# EAGLE board ETAG_v3 (EAGLE 7.5.0)
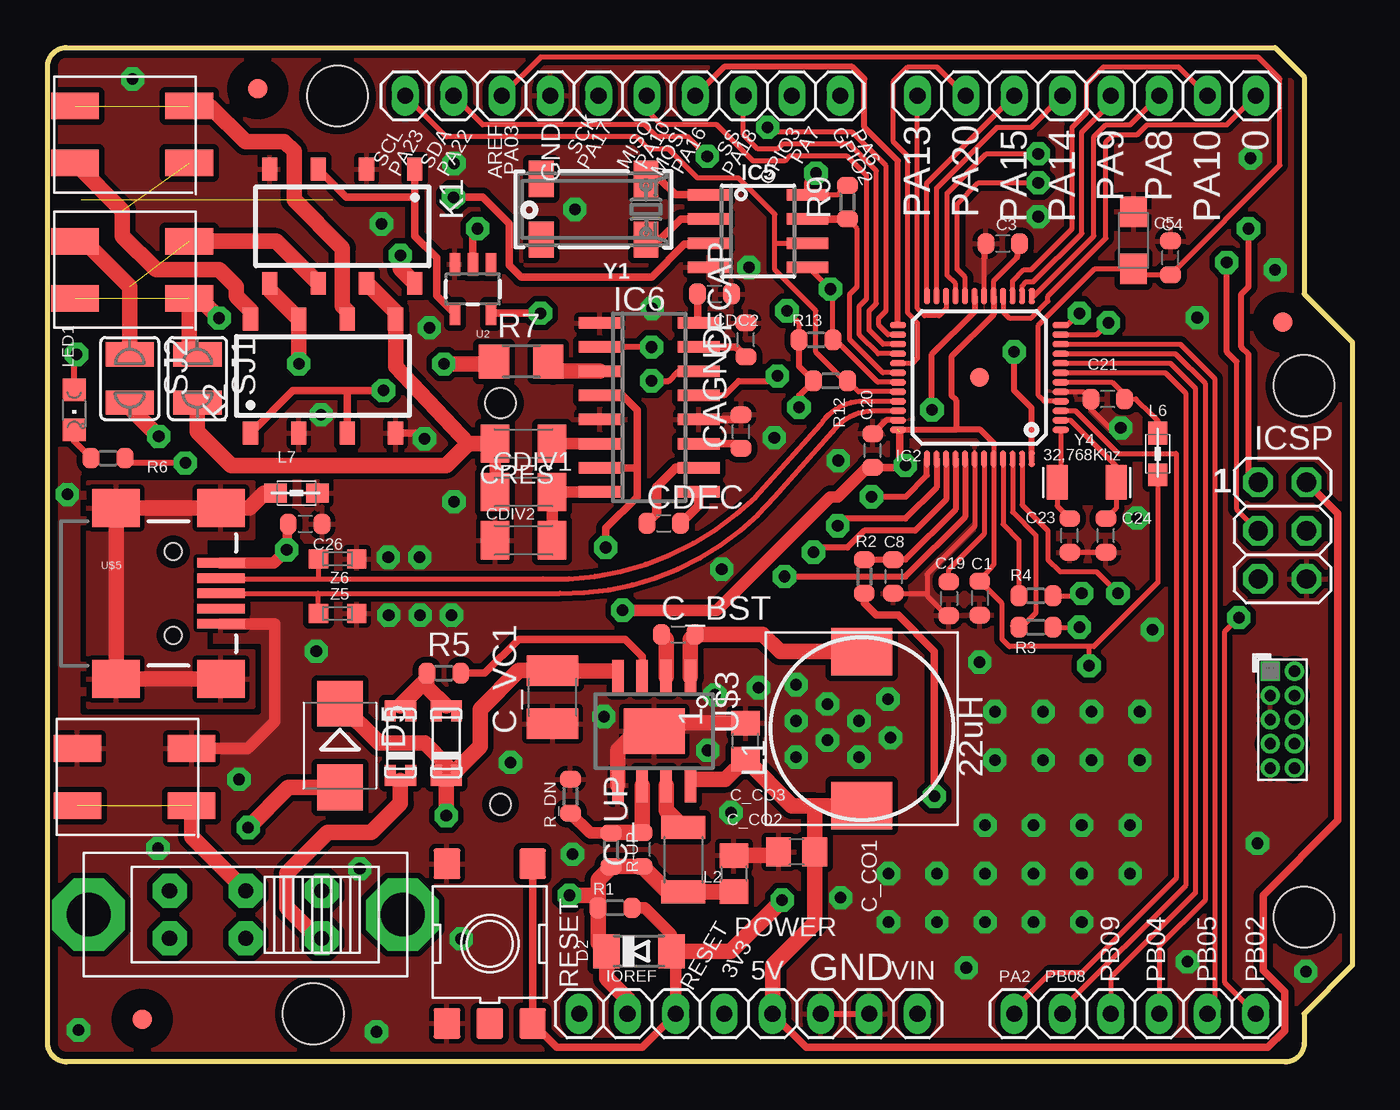
[diagram p0: board, top side]
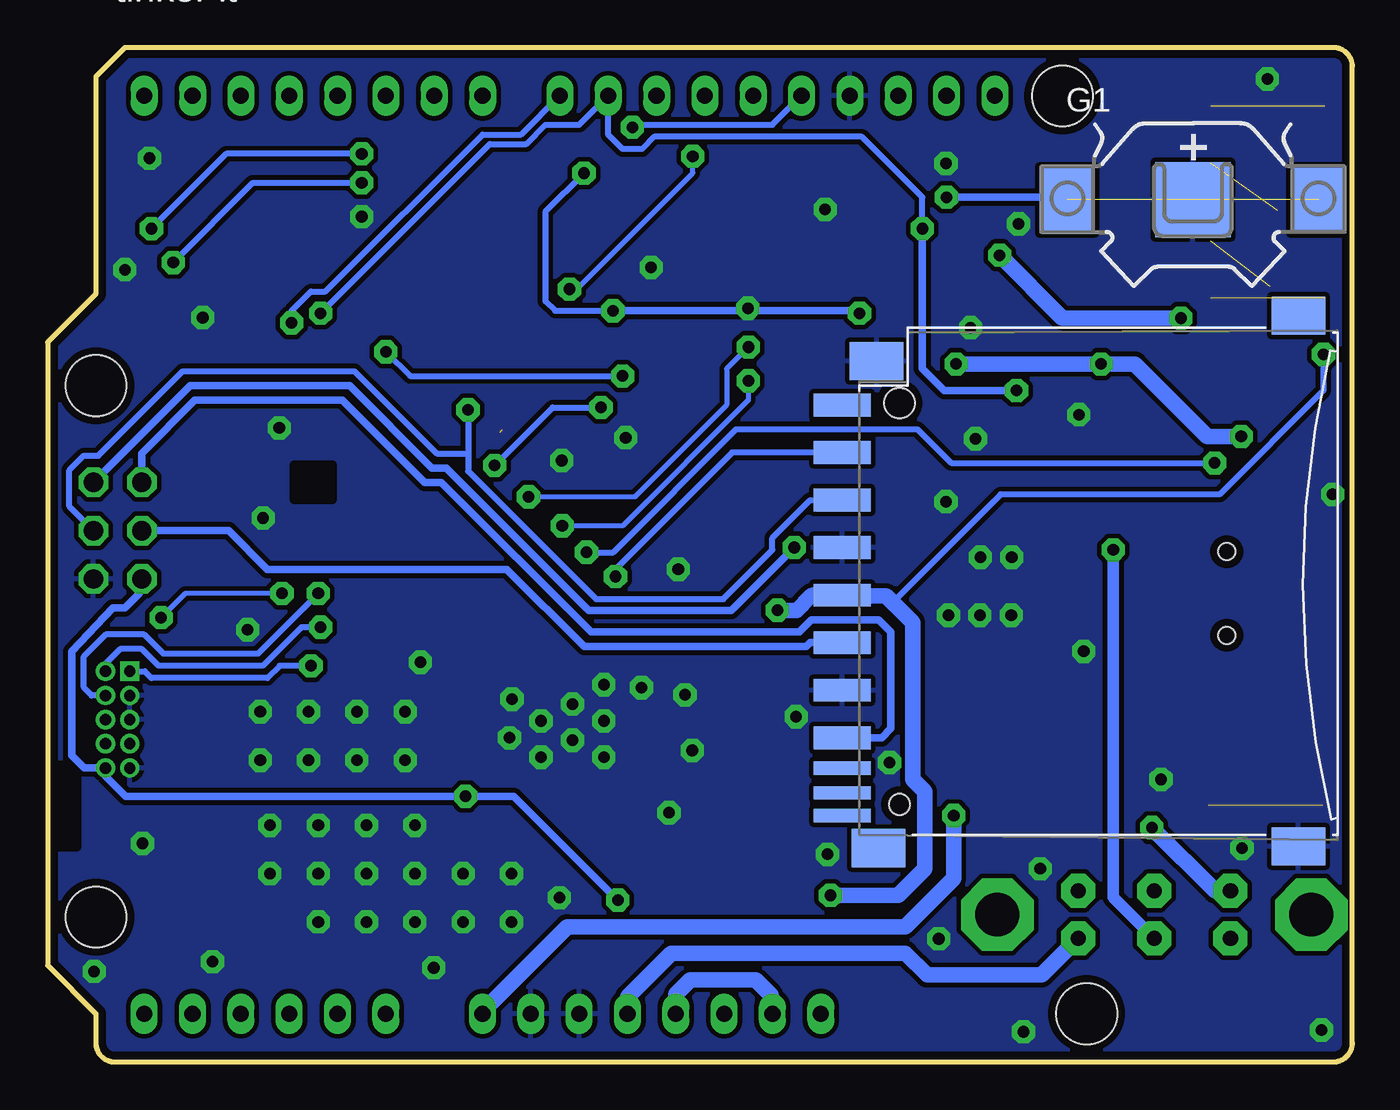
[diagram p1: board, bottom side, seen from below]

Size 68.58 x 53.34 mm. Coordinates in mm from the lower left corner, seen from the top.
Outline: 64.52,53.34 66.04,51.82 66.04,40.39 68.58,37.85 68.58,5.08 66.04,2.54 66.04,1 arc-90 65.04,0 1,0 arc-90 0,1 0,52.34 arc-90 1,53.34 64.52,53.34
Copper layers (1*2+15*16): Top 0.035mm / dielectric 0.5mm / Route2 0.035mm / dielectric 0.4mm / Ground 0.035mm / dielectric 0.5mm / Bottom 0.035mm
Design rules "ArduinoUno *": minimum track width 6mil, minimum drill 16mil, track to track 8mil, track to pad 8mil, pad to pad 4mil, via to via 8mil, smd to smd 4mil, copper to edge 16mil, drill to drill 10mil, minimum pad ring 6mil, minimum via ring 4.5mil, stop-mask expansion 1mil, vias tented up to drill 32mil, thermal gap 10mil
Net classes: 1 USB: width 0.203 mm, drill 0.305 mm, clearance 0.178 mm; 2 gnd: width 0.254 mm, drill 0.254 mm, clearance 0.178 mm; 3 usbvcc: width 0.203 mm, drill 0.406 mm, clearance 0.178 mm; 4 USBpair: width 0.254 mm, drill 0.406 mm, clearance 0.406 mm
Holes 3.2 mm at 66.04,35.56 66.04,7.62 15.24,50.8 13.97,2.54
bRestrict: area 67.1,11.3 to 68.8,15.6
vRestrict: area 42.2,47.2 to 43.3,48.8; area 48.3,47.5 to 49.5,48.9; area 47.6,47.4 to 48.8,48.9; area 50.2,47.4 to 51.3,48.9; area 44.7,47.2 to 45.8,48.8

## Footprints (pad centres in the part's own frame; a part is rotated, then mirrored left to right if it is on the bottom)
1X06 = drill 0.85 pad 1.422 long: 1 -6.35,0; 2 -3.81,0; 3 -1.27,0; 4 1.27,0; 5 3.81,0; 6 6.35,0
LITE_TRAP_MINI = smd 2.5 x 1.4: P$1 -3,1.5; P$2 3,1.5; P$3 -3,-1.5; P$4 3,-1.5
C0603-ROUND = smd 0.898 x 1.1: 1 -0.889,0; 2 0.889,0
SMC_A = smd 1.6 x 1.4: + -1.5,0; - 1.5,0
C0805 = smd 1.3 x 1.5: 1 -0.95,0; 2 0.95,0
C1210 = smd 1.6 x 2.7: 1 -1.4,0; 2 1.4,0
C1206K = smd 1.5 x 2: 1 -1.5,0; 2 1.5,0
PINHEAD_2X05_127 = drill 0.6 pad 1.016 square: 1 -0.635,2.54 | drill 0.6 pad 1.016: 2 0.635,2.54; 3 -0.635,1.27; 4 0.635,1.27; 5 -0.635,0; 6 0.635,0; 7 -0.635,-1.27; 8 0.635,-1.27; 9 -0.635,-2.54; 10 0.635,-2.54
MINIMELF = smd 1.4 x 1.8: A 1.7,0; C -1.7,0
LL-34 = smd 0.6 x 1.65: P$1 -1.95,0; P$2 1.95,0 | smd 0.5 x 0.575: P$3 -1.4,0.537; P$4 -1.4,-0.537; P$5 1.4,0.537; P$6 1.4,-0.537
SMB = smd 2.4 x 2.4: A 2.2,0; C -2.2,0
FIDUCIA-MOUNT = smd 1.016 x 1.016: P$1 0,0
10MM_SM_COIN_CELL_CLIP = smd 2.9 x 3.5: +@1 -6.6,0; +@2 6.6,0 | smd 3.96 x 3.96: - 0,0
TQFP48-7X7 = smd 0.85 x 0.32: 1 -4.275,2.75; 2 -4.275,2.25; 3 -4.275,1.75; 4 -4.275,1.25; 5 -4.275,0.75; 6 -4.275,0.25; 7 -4.275,-0.25; 8 -4.275,-0.75; 9 -4.275,-1.25; 10 -4.275,-1.75; 11 -4.275,-2.25; 12 -4.275,-2.75; 25 4.275,-2.75; 26 4.275,-2.25; 27 4.275,-1.75; 28 4.275,-1.25; 29 4.275,-0.75; 30 4.275,-0.25; 31 4.275,0.25; 32 4.275,0.75; 33 4.275,1.25; 34 4.275,1.75; 35 4.275,2.25; 36 4.275,2.75 | smd 0.32 x 0.85: 13 -2.75,-4.275; 14 -2.25,-4.275; 15 -1.75,-4.275; 16 -1.25,-4.275; 17 -0.75,-4.275; 18 -0.25,-4.275; 19 0.25,-4.275; 20 0.75,-4.275; 21 1.25,-4.275; 22 1.75,-4.275; 23 2.25,-4.275; 24 2.75,-4.275; 37 2.75,4.275; 38 2.25,4.275; 39 1.75,4.275; 40 1.25,4.275; 41 0.75,4.275; 42 0.25,4.275; 43 -0.25,4.275; 44 -0.75,4.275; 45 -1.25,4.275; 46 -1.75,4.275; 47 -2.25,4.275; 48 -2.75,4.275 | smd 1 x 1: P$1 0,0
SOIC8_150MIL = smd 0.6 x 2.2: 1 -1.905,-2.6; 2 -0.635,-2.6; 3 0.635,-2.6; 4 1.905,-2.6; 5 1.905,2.6; 6 0.635,2.6; 7 -0.635,2.6; 8 -1.905,2.6
SO16 = smd 0.6 x 2.2: 1 -4.445,-2.6; 2 -3.175,-2.6; 3 -1.905,-2.6; 4 -0.635,-2.6; 5 0.635,-2.6; 6 1.905,-2.6; 7 3.175,-2.6; 8 4.445,-2.6; 9 4.445,2.6; 10 3.175,2.6; 11 1.905,2.6; 12 0.635,2.6; 13 -0.635,2.6; 14 -1.905,2.6; 15 -3.175,2.6; 16 -4.445,2.6
2X03 = drill 1.016 pad 1.55 octagon: 1 -2.54,-1.27; 2 -2.54,1.27; 3 0,-1.27; 4 0,1.27; 5 2.54,-1.27; 6 2.54,1.27
1X10 = drill 0.85 pad 1.422 long: 1 -11.43,0; 2 -8.89,0; 3 -6.35,0; 4 -3.81,0; 5 -1.27,0; 6 1.27,0; 7 3.81,0; 8 6.35,0; 9 8.89,0; 10 11.43,0
1X08 = drill 0.85 pad 1.422 long: 1 -8.89,0; 2 -6.35,0; 3 -3.81,0; 4 -1.27,0; 5 1.27,0; 6 3.81,0; 7 6.35,0; 8 8.89,0
SOP08 = smd 0.8 x 1.2: 1 -3.81,-3; 2 -1.27,-3; 3 1.27,-3; 4 3.81,-3; 5 3.81,3; 6 1.27,3; 7 -1.27,3; 8 -3.81,3
SLF10165 = smd 2.5 x 3.2: P$1 -4.05,0; P$2 4.05,0
L1008(2520METRIC) = smd 1.2 x 2.3: 1 -1.7,0; 2 1.7,0
0805 = smd 1.2 x 1: 1 -1.1,0; 2 1.1,0
CHIPLED_0805 = smd 1.2 x 1.2: A 0,-1.05; C 0,1.05
R0603-ROUND = smd 0.898 x 1.1: 1 -0.889,0; 2 0.889,0
R1206 = smd 1.6 x 1.803: 1 -1.422,0; 2 1.422,0
TS42 = smd 1.6 x 1.4: 1 -4.2,2.25; 2 4.2,2.25; 3 -4.2,-2.25; 4 4.2,-2.25; 5 -4.2,0
SJW = smd 1.27 x 2.54: 1 -1.27,0; 2 1.27,0
TP-SP = smd 0.8 x 0.8 bottom: X 0,0
SOT23-5 = smd 0.55 x 1.2: 1 -0.95,-1.3; 2 0,-1.3; 3 0.95,-1.3; 4 0.95,1.3; 5 -0.95,1.3
SOP08_GNDPAD = smd 0.6 x 1.8: 1 -1.905,-2.85; 2 -0.635,-2.85; 3 0.635,-2.85; 4 1.905,-2.85; 5 1.905,2.85; 6 0.635,2.85; 7 -0.635,2.85; 8 -1.905,2.85 | smd 3.2 x 2.4: P$1 0,0
06132 = smd 1.2 x 3: 1 6.9,0.9; 2 4.4,0.9; 3 1.9,0.9; 4 -0.6,0.9; 5 -3.1,0.9; 6 -5.6,0.9; 7 -8.1,0.9; 9 9.4,0.9 | smd 0.7 x 3: 8 -9.7,0.9; CD -11,0.9; WP -12.2,0.9 | smd 2 x 2.8: GP -13.8,-23.07; GP2 14.1,-23.07; GP3 11.7,-0.9; GP4 -13.9,-1 | hole 1.1: -11.6,-2.1 | hole 1.6: 9.5,-2.1
USB-MINIB = smd 2.5 x 0.5: D+ 2.5,0; D- 2.5,0.8; GND 2.5,-1.6; ID 2.5,-0.8; VBUS 2.5,1.6 | smd 2.5 x 2: MTN1 -3,4.5; MTN2 2.5,4.5; MTN3 -3,-4.5; MTN4 2.5,-4.5 | hole 0.9: 0,2.2; 0,-2.2
MFS201N-9-Z = drill 0.8 pad 1.778 octagon: P$1 -4,1.25; P$2 -4,-1.25; P$3 0,1.25; P$4 0,-1.25; P$5 4,1.25; P$6 4,-1.25 | drill 2.3 pad 3.81 octagon: P$7 -8.25,0; P$8 8.25,0
CRYSTAL_8X3.8 = smd 1.3 x 1.9: P$1 -2.75,-1.6; P$2 2.75,-1.6; P$3 2.75,1.6; P$4 -2.75,1.6
RESONATOR_EPSON_FC_145 = smd 1.1 x 1.8: P$1 -1.55,0; P$2 1.55,0
CT/CN0603 = smd 1 x 1: 1 -1,0; 2 1,0

## Placement (x,y rotation side)
AD  FH254-106DF08500V  [1X06]  57.15,2.54 0 top
ANT1  ANT1_IN  [LITE_TRAP_MINI]  4.45,41.66 180 top
ANT2  ANT2_IN  [LITE_TRAP_MINI]  4.45,48.77 180 top
C1  100nF  [C0603-ROUND]  48.99,24.39 270 top
C3  100nF  [C0603-ROUND]  50.2,43.03 0 top
C4  100nF  [C0603-ROUND]  59.02,42.28 90 top
C5  4u7  [SMC_A]  57.08,43.2 90 top
C8  10nF  [C0603-ROUND]  44.45,25.53 270 top
C19  1uF  [C0603-ROUND]  47.37,24.36 270 top
C20  100nF  [C0603-ROUND]  43.37,32.15 90 top
C21  100nF  [C0603-ROUND]  55.72,34.86 180 top
C23  22p  [C0603-ROUND]  53.72,27.69 90 top
C24  22p  [C0603-ROUND]  55.63,27.69 90 top
C26  10n  [C0603-ROUND]  13.54,28.29 0 top
C_BST  0.1uF  [C0603-ROUND]  33.15,22.48 0 top
C_CO1  22uF  [C0805]  39.37,11.05 180 top
C_CO2  22uF  [C0805]  36.07,9.91 270 top
C_CO3  10uF  [C0805]  36.68,16.87 90 top
C_UP  680pF  [C0603-ROUND]  31.24,11.18 90 top
C_VC1  10uF  [C1210]  26.54,19.18 90 top
CAGND  [C0603-ROUND]  36.45,33.15 90 top
CDC2  [C0603-ROUND]  35.05,40.39 0 top
CDEC  [C0603-ROUND]  32.38,28.32 0 top
CDIV1  [C1206K]  25.02,29.97 0 top
CDIV2  [C1206K]  25.02,27.43 180 top
CFCAP  [C0603-ROUND]  36.7,37.97 90 top
CN2  PINHEAD-2x5-P1.27  [PINHEAD_2X05_127]  64.9,18 0 top
CRES  [C1206K]  25.02,32.51 180 top
D2  CD1206-S01575  [MINIMELF]  31.08,5.82 0 top
D3  [LL-34]  18.54,16.76 90 top
D4  [LL-34]  20.95,16.76 90 top
D5  M7  [SMB]  15.37,16.64 270 top
FD1  FIDUCIALMOUNT  [FIDUCIA-MOUNT]  11.05,51.18 180 top
FD2  FIDUCIALMOUNT  [FIDUCIA-MOUNT]  4.97,2.25 0 top
FD3  FIDUCIALMOUNT  [FIDUCIA-MOUNT]  64.92,38.89 0 top
G1  10MM_SM_COIN_CELL_CLIP  [10MM_SM_COIN_CELL_CLIP]  8.38,45.34 0 bottom
IC2  SAMD21G18A-AUT  [TQFP48-7X7]  48.97,35.99 180 top
IC5  RTC_PCF8523T  [SOIC8_150MIL]  37.34,43.69 270 top
IC6  EM4095  [SO16]  31.62,34.42 270 top
ICSP  3x2 M  [2X03]  64.9,27.94 270 top
IOH  FH254-110DF08500V  [1X10]  30.23,50.8 180 top
IOL  FH254-108DF08500V  [1X08]  54.61,50.8 180 top
K1  G3VM-202J1  [SOP08]  15.49,43.94 180 top
K2  G3VM-202J1  [SOP08]  14.48,36.07 0 top
L1  22uH  [SLF10165]  42.8,17.53 90 top
L2  2.2uH  [L1008(2520METRIC)]  33.41,10.64 270 top
L6  MH2029-300Y  [0805]  58.35,31.98 270 top
L7  MH2029-300Y  [0805]  13.08,29.92 0 top
LED1  Yellow  [CHIPLED_0805]  1.4,34.29 180 top
POWER  FH254-108DF08500V  [1X08]  36.83,2.54 0 top
R1  10k  [R0603-ROUND]  29.82,8.11 180 top
R2  330R  [R0603-ROUND]  42.93,25.53 270 top
R3  0R  [R0603-ROUND]  51.94,22.86 180 top
R4  0R  [R0603-ROUND]  51.94,24.51 0 top
R5  10k  [R0603-ROUND]  20.83,20.45 0 top
R6  100R  [R0603-ROUND]  3.17,31.75 0 top
R7  [R1206]  24.89,36.83 0 top
R9  10k  [R0603-ROUND]  42.04,45.21 90 top
R12  10k  [R0603-ROUND]  41.15,35.81 180 top
R13  10k  [R0603-ROUND]  40.39,37.97 180 top
R-UP  16K_1%  [R0603-ROUND]  29.62,11.15 270 top
R_DN  5.1K_0.1%  [R0603-ROUND]  27.48,13.97 270 top
RESET  TS42031-160R-TR-7260  [TS42]  23.24,6.22 90 top
SJ1  [SJW]  7.87,35.94 270 top
SJ2  [SJW]  4.32,35.94 270 top
TP_0  TP_SP  [TP-SP]  63.5,50.8 0 top
TP_1  TP_SP  [TP-SP]  60.96,50.8 0 top
TP_2  TP_SP  [TP-SP]  58.42,50.8 0 top
TP_3  TP_SP  [TP-SP]  55.88,50.8 0 top
TP_4  TP_SP  [TP-SP]  53.34,50.8 0 top
TP_5  TP_SP  [TP-SP]  50.8,50.8 0 top
TP_6  TP_SP  [TP-SP]  48.26,50.8 0 top
TP_7  TP_SP  [TP-SP]  45.72,50.8 0 top
TP_8  TP_SP  [TP-SP]  41.66,50.8 0 top
TP_9  TP_SP  [TP-SP]  39.12,50.8 0 top
TP_10  TP_SP  [TP-SP]  36.58,50.8 0 top
TP_12  TP_SP  [TP-SP]  31.5,50.8 0 top
TP_A0  TP_SP  [TP-SP]  50.8,2.54 0 top
TP_A1  TP_SP  [TP-SP]  53.34,2.54 0 top
TP_A2  TP_SP  [TP-SP]  55.88,2.54 0 top
TP_A3  TP_SP  [TP-SP]  58.42,2.54 0 top
TP_A4  TP_SP  [TP-SP]  60.96,2.54 0 top
TP_AREF  TP_SP  [TP-SP]  23.88,50.8 0 top
TP_MOSI  TP_SP  [TP-SP]  34.04,50.8 0 top
TP_RESET  TP_SP  [TP-SP]  33.02,2.54 0 top
TP_SCK  TP_SP  [TP-SP]  28.96,50.8 0 top
TP_SCL  TP_SP  [TP-SP]  18.8,50.8 0 top
TP_SDA  TP_SP  [TP-SP]  21.34,50.8 0 top
U2  TC7SU04F  [SOT23-5]  22.35,40.64 180 top
U$3  BD93291EFJSOP8_W_GND  [SOP08_GNDPAD]  31.88,17.4 180 top
U$4  SDMMC06132  [06132]  25.91,25.15 90 bottom
U$5  USB-MINIB-5PIN  [USB-MINIB]  6.6,24.64 0 top
U$6  LITE_TRAP_2POS  [LITE_TRAP_MINI]  4.57,14.99 180 top
U$9  MFS201N-9-Z  [MFS201N-9-Z]  10.41,7.75 0 top
Y1  32.768kHz  [CRYSTAL_8X3.8]  28.7,44.83 180 top
Y4  32,768Khz  [RESONATOR_EPSON_FC_145]  54.61,30.48 0 top
Z5  CG0603MLC-05E  [CT/CN0603]  15.24,23.58 0 top
Z6  CG0603MLC-05E  [CT/CN0603]  15.24,26.45 0 top

## Library data of the parts
AD = Connettori; MONTHLY_USAGE: 86722.85; PART_NUMBER: 20TW-535; PRICE: _0.03; SUPPLIER: CBC_elettronica__s.r.l.; TYPE: Connettori
ANT1 ANT2 U$6 = con-molex
C1 C3 C4 C20 C21 = Condensatori; CASE: 0603; MONTHLY_USAGE: _____; PART_NUMBER: cl10b104kbnc; PRICE: _____; SUPPLIER: _____; TYPE: Condensatori
C5 = Condensatori; CASE: CaseA_(1206); MONTHLY_USAGE: _____; PART_NUMBER: TAJA475M016RNJ; PRICE: _____; SUPPLIER: _____; TYPE: Condensatori
C8 = Condensatori; CASE: 0603; MONTHLY_USAGE: _____; PART_NUMBER: 10nF_0603; PRICE: _____; SUPPLIER: _____; TYPE: Condensatori
C19 = Condensatori; CASE: 0603; MONTHLY_USAGE: _____; PART_NUMBER: 1uF_0603/GRM188R61E105KA12D; PRICE: _____; SUPPLIER: _____; TYPE: Condensatori
C23 C24 = Condensatori; CASE: 0603; MONTHLY_USAGE: _____; PART_NUMBER: 22pF_0603; PRICE: _____; SUPPLIER: _____; TYPE: Condensatori
C26 = Condensatori; CASE: 0603; MONTHLY_USAGE: _____; PART_NUMBER: 10nF_0603; PRICE: _____; SUPPLIER: _____; TYPE: Condensatori; VALUE: 10nF
C_BST C_CO1-C_CO3 C_UP C_VC1 CAGND CDC2 CDEC CDIV1 CDIV2 CFCAP CRES L1 L2 R7 = rcl
CN2 = Connettori
D2 = Diodi; CASE: 1206; MONTHLY_USAGE: _____; PART_NUMBER: CD1206-S01575; PRICE: _____; SUPPLIER: _____; TYPE: Diodi
D3 D4 = diode
D5 = Diodi; CASE: SMA; MONTHLY_USAGE: _____; PART_NUMBER: M7; PRICE: _____; SUPPLIER: _____; TYPE: Diodi
FD1-FD3 TP_0 TP_1-TP_10 TP_12 TP_A0 TP_A1-TP_A4 TP_AREF TP_MOSI TP_RESET TP_SCK TP_SCL TP_SDA = SmartPrj
G1 = battery
IC2 = IntegratedCircuits
IC5 U$4 Y1 = microbuilder
IC6 = em-microelectronic
ICSP = Connettori; MONTHLY_USAGE: _____; PART_NUMBER: PH254-203DF118A00V; PRICE: _____; SUPPLIER: _____; TYPE: Connettori; VALUE: ICSP
IOH = Connettori; MONTHLY_USAGE: _____; PART_NUMBER: 20TW-537; PRICE: _____; SUPPLIER: _____; TYPE: Connettori
IOL POWER = Connettori; MONTHLY_USAGE: _____; PART_NUMBER: 20TW-536; PRICE: _____; SUPPLIER: _____; TYPE: Connettori
K1 K2 = relay; OC_FARNELL: unknown; OC_NEWARK: unknown
L6 L7 = Protezione; MONTHLY_USAGE: _____; PART_NUMBER: BLM21PG300SN1D_/_MH2029-300Y; PRICE: _____; SUPPLIER: _____; TYPE: Protezione
LED1 = Opto; MONTHLY_USAGE: _____; PART_NUMBER: KPT-2012YC; PRICE: _____; SUPPLIER: _____; TYPE: Opto
R1 R5 R9 R12 R13 = Resistenze; CASE: 0603; MONTHLY_USAGE: _____; PART_NUMBER: CR0603JW103L; PRICE: _____; SUPPLIER: _____; TYPE: Resistenze
R2 = Resistenze; CASE: 0603; MONTHLY_USAGE: _____; PART_NUMBER: 330R_0603; PRICE: _____; SUPPLIER: _____; TYPE: Resistenze
R3 R4 R6 = Resistenze; CASE: 0603; MONTHLY_USAGE: _____; PART_NUMBER: 0R_0603; PRICE: _____; SUPPLIER: _____; TYPE: Resistenze
R-UP = Resistenze; PART_NUMBER: CR0603FW104L
R_DN = Resistenze; CASE: 0603; MONTHLY_USAGE: _____; PRICE: _____; SUPPLIER: _____; TYPE: Resistenze; VALUE: 19K1_0,1%
RESET = Switches; MONTHLY_USAGE: _____; PART_NUMBER: IT-1157AHNP-160G-G_GTR; PRICE: _____; SUPPLIER: _____; TYPE: Switches; VALUE: TS42
SJ1 SJ2 = jumper
U2 = SparkFun-DigitalIC; NOTE: RETIRED; PROD_ID: 8211
U$3 = v-reg
U$5 = USB_miniB
U$9 = switch
Y4 = Cristalli; MONTHLY_USAGE: _____; PART_NUMBER: ABS07-32.768KHZ-T; PRICE: _____; SUPPLIER: _____; TYPE: Cristalli
Z5 Z6 = Protezione; MONTHLY_USAGE: _____; PART_NUMBER: BRNCG0603MLC-05E; PRICE: _____; SUPPLIER: _____; TYPE: Protezione; VALUE: BRNCG0603MLC-05E

## Nets
2GND [gnd]: L7.1 U$5.MTN1 U$5.MTN2 U$5.MTN3 U$5.MTN4
5-GND: RESET.5
+3V3: C1.1 C3.2 C20.1 C_CO2.2 C_UP.1 CN2.1 D2.C IC2.17 IC2.36 IC2.44 IC5.8 L2.2 L6.2 LED1.A POWER.2 POWER.4 R1.2 R9.2 R12.2 R13.2 R-UP.2 U2.5 U$4.4
+5V [usbvcc]: C_CO1.1 C_CO3.1 D3.P$1 IC6.4 IC6.7 ICSP.2 L1.P$1 POWER.5 U$3.8 U$9.P$6
DGI_GPIO1: TP_7.X
DGI_GPIO2_PA6: IC2.11 IOH.1 TP_8.X
DGI_GPIO3_PA7: IC2.12 IOH.2 K2.1 K2.3 TP_9.X U2.2
GND [gnd]: C1.2 C3.1 C4.2 C5.- C8.2 C19.2 C20.2 C21.2 C23.1 C24.1 C26.2 C_CO1.2 C_CO2.1 C_CO3.2 C_VC1.1 CAGND.2 CDC2.2 CDIV2.2 CFCAP.2 CN2.3 CN2.5 CN2.9 G1.- IC2.5 IC2.18 IC2.35 IC2.42 IC5.4 IC6.1 IC6.5 IC6.12 ICSP.6 IOH.7 K1.2 K1.4 K2.2 K2.4 L7.2 POWER.6 POWER.7 R_DN.1 RESET.1 RESET.2 U2.3 U$3.5 U$3.P$1 U$4.3 U$4.6 U$4.GP U$4.GP3 U$5.GND U$6.P$3 U$6.P$4 Z5.2 Z6.2
N$1: LED1.C R6.1
N$2: IC5.2 Y1.P$4
N$3: IC5.1 Y1.P$1
N$4: CFCAP.1 IC6.15
N$5: CAGND.1 IC6.11
N$6: C_BST.1 U$3.2
N$7: C_UP.2 R-UP.1 R_DN.2 U$3.6
N$8: R5.2 U$3.3
N$9: K1.5 K2.7 R7.1 SJ2.2
N$10: C21.1 IC2.6 L6.1
N$11: CDIV1.1 CRES.2 K1.7 K2.5 SJ1.2
N$12: CRES.1 IC6.6
N$13: CDIV1.2 CDIV2.1 IC6.8
N$14: ANT1.P$1 ANT1.P$2 K1.8 SJ1.1
N$16: ANT2.P$1 ANT2.P$2 K2.8
N$17: CDC2.1 IC6.16
N$18: CDEC.2 IC6.9
N$19: CDEC.1 IC6.10
N$20: IC6.3 R7.2
N$21: D5.A U$9.P$1
N$24: D3.P$2 D4.P$2 R5.1
N$26: L2.1 U$3.7
N$27: C_BST.2 L1.P$2 U$3.1
N$30: ANT2.P$3 ANT2.P$4 K2.6
N$32: K1.1 K1.3 U2.4
N$35: ANT1.P$3 ANT1.P$4 K1.6 SJ2.1
N$56: POWER.1
PA00_XIN32: C23.2 IC2.1 Y4.P$1
PA01_XOUT32: C24.2 IC2.2 Y4.P$2
PA02_AIN0: AD.1 IC2.3 TP_A0.X
PA03_AREFA: C4.1 C5.+ IC2.4 IOH.8 TP_AREF.X
PA04_AIN4: AD.4 IC2.9 TP_A3.X
PA05_AIN5: AD.5 IC2.10 TP_A4.X
PA08_TCC0-W0_PA8: IC2.13 IOL.3 TP_2.X
PA09_TCC0-W1_PA9: IC2.14 IOL.4 TP_3.X
PA10_MISO: IC2.28 IOH.5 TP_12.X
PA10_TCC0-W2_PA10: IC2.15 IOL.2 TP_1.X
PA11_TCC0-W3_PA11: IC2.16 IOL.1 TP_0.X
PA13: IC2.22 IOL.8
PA14_TCC0-W4: IC2.23 IOL.5 TP_4.X
PA15_TCC0-W5: IC2.24 IOL.6 TP_5.X
PA16_MOSI: IC2.25 IOH.4 TP_MOSI.X
PA17_SCK: IC2.26 IOH.6 TP_SCK.X
PA18_SS: IC2.27 IOH.3 TP_10.X
PA20_TCC0-W6: IC2.29 IOL.7 TP_6.X
PA21_RTC_INT: IC2.30 IC5.7 R9.1
PA22_SDA: IC2.31 IC5.5 IOH.9 R13.1 TP_SDA.X
PA23_SCL: IC2.32 IC5.6 IOH.10 R12.1 TP_SCL.X
PA27_TX_LED: IC2.39 R6.2
PA28_SD_CS: IC2.41 U$4.1
PA30_SWCLK: IC2.45 R4.1
PA31_SWDIO: IC2.46 R3.2
PB02: AD.6 IC2.47
PB03_RFIDIN: IC2.48 IC6.13
PB08_AIN2: AD.2 IC2.7 TP_A1.X
PB09_AIN3: AD.3 IC2.8 TP_A2.X
PB10_S4_SPI_MOSI: IC2.19 ICSP.4 U$4.2
PB11_S4_SPI_SCK: IC2.20 ICSP.3 U$4.5
PB12_S4_SPI_MISO: IC2.21 ICSP.1 U$4.7
PB22_RFID_RDY: IC2.37 IC6.2
PB23_RFID_SHD: IC2.38 IC6.14
PWRIN_1 [USB]: U$6.P$1 U$6.P$2 U$9.P$3
RESET: CN2.10 D2.A ICSP.5 POWER.3 R1.1 R2.2 RESET.3 RESET.4 TP_RESET.X
SWCLK: CN2.4 R4.2
SWDIO: CN2.2 R3.1
TARGET_RESET: C8.1 IC2.40 R2.1
TARGET_USB_N [USBpair]: IC2.33 U$5.D- Z6.1
TARGET_USB_P [USBpair]: IC2.34 U$5.D+ Z5.1
VBAT1: G1.+@1 G1.+@2 IC5.3
VDDCORE: C19.1 IC2.43
VIN: C_VC1.2 D4.P$1 D5.C POWER.8 U$3.4
XUSB [usbvcc]: C26.1 U$5.VBUS U$9.P$4

## Tracks (layer width: path | path; a pad name or v marks a point on that pad's centre or on a via)
2GND
  Top 0.813: U$5.MTN4 9.41,20.07 9.27,20.07 9.2,20.14 U$5.MTN3 U$5.MTN1 U$5.MTN2 10.6,29.14 11.38,29.92 L7.1
  pour Top: 2.16,30.48 10.79,30.48 10.79,27.56 8.26,27.56 8.26,21.59 10.79,21.59 10.79,18.67 2.16,18.67
+3V3  (via drill 0.61)  (1 unrouted)
  Top 0.127: 49.71,31.73 IC2.44
  Top 0.254: 49.72,32.55 IC2.44 49.72,26.13 C1.1 50.16,24.11 50.16,22.23 50.55,21.84 54.74,21.84 | IC2.17 49.72,40.58 49.73,40.59 49.73,41.1 50.96,42.33 C3.2 | L6.2 58.35,25.2 54.99,21.84 54.74,21.84 | IC5.8 41.53,45.59 R9.2 | C20.1 43.03,31.39 | v54.74,20.83 54.74,21.84 | R13.2 39.5,38.86 v38.86,39.5
  Top 0.305: 50.96,42.31 C3.2 | IC2.17 49.72,39.31 47.5,37.08 47.5,35.05 47.75,34.8 47.75,33.24 | IC2.36 47.75,33.24 | v39.5,34.42 39.5,35.05 R12.2 39.5,36.58 R13.2 | IC5.8 39.94,46.29 v40.39,46.74 | 49.72,32.55 49.03,33.24 47.75,33.24 | LED1.A 1.4,37.08 v1.52,37.21
  Top 0.406: 44.8,33.12 44.8,31.66 v45.09,31.37 44.98,31.26 C20.1 | U2.5 23.33,39.37 v25.91,39.37
  Top 0.61: 30.55,2.61 POWER.2 | C20.1 43.07,31.26 41.53,29.72 41.15,29.72 35.18,23.75 v30.23,23.75
  Top 0.813: 30.55,2.61 30.55,3.23 29.38,4.4 D2.C 28.93,6.27 R1.2 28.93,8.76 | C_CO2.2 36.05,8.94 L2.2 32.59,8.94 C_UP.1 29.64,10.29 R-UP.2 28.93,9.58 28.93,8.76 | 28.93,8.76 v27.43,8.76
  Bottom 0.305: v40.39,46.74 42.42,44.7 42.42,40.01 41.91,39.5 v38.86,39.5 | v45.09,31.37 42.04,34.42 v39.5,34.42 | CN2.1 63.47,20.54 63.12,20.19 57.02,20.19 56.39,20.83 v54.74,20.83 | v1.52,37.21 1.52,35.31 6.99,29.84 18.48,29.84 24.07,24.26 24.07,24.07
  Bottom 0.406: v25.91,39.37 26.04,39.5 v38.86,39.5
  Bottom 0.61: 30.55,3.5 30.55,2.61 POWER.2 | U$4.4 26.27,24.51
  Bottom 0.813: POWER.4 35.56,3.56 34.8,4.32 31.37,4.32 30.55,3.5 | U$4.4 28.31,24.55 arc-45 28.49,24.47 29.21,23.75 v30.23,23.75 | v27.43,8.76 23.88,8.76 22.48,10.16 22.48,14.22 23.11,14.86 23.11,23.11 24.07,24.07 24.51,24.51 26.27,24.51
+5V  (via drill 0.61)
  Top 0.406: U$3.8 34.04,14.93 34.04,14.86 | ICSP.2 67.82,28.83 67.82,12.7 63.88,8.76 63.88,4.83 65.02,3.68 65.02,1.65 64.14,0.76 39.88,0.76 POWER.5 | IC6.4 30.23,35.05 30.99,34.29 30.99,31.24 | 30.99,31.24 30.99,29.72 29.34,28.07 v29.34,27.05 | IC6.7 30.99,31.24
  Top 0.813: 34.04,14.86 35.62,14.86 C_CO3.1 39.12,13.48 40.26,13.48 | 40.26,13.48 L1.P$1 | 40.26,13.48 40.32,13.41 C_CO1.1 40.32,7.3 38.1,5.08 POWER.5 | U$9.P$6 14.2,6.5 12.57,8.13 12.57,9.91 14.73,12.06 17.02,12.06 18.54,13.59 D3.P$1
  Bottom 0.406: v29.34,27.05 32.64,23.75 40.13,23.75 47.62,31.24 48.39,31.24 52.7,35.56 61.09,35.56 ICSP.2
  Bottom 0.813: POWER.5 38.1,3.43 35.81,5.71 23.5,5.71 22.35,4.57 16.34,4.57 U$9.P$6
DGI_GPIO2_PA6  (via drill 0.61)
  Top 0.254: IC2.11 55.13,38.24 v55.75,38.86
  Bottom 0.305: TP_8.X 43.69,48.77 45.72,48.77 53.98,40.51 54.74,40.51 55.75,39.5 v55.75,38.86
DGI_GPIO3_PA7  (via drill 0.61)
  Top 0.254: IC2.12 53.6,38.74 v54.23,39.37
  Top 0.406: K2.1 12.88,35.31 15.62,35.31 | 15.62,35.31 v17.65,35.31 | U2.2 22.35,43.56 v22.61,43.81 | K2.3 15.75,35.18 15.62,35.31
  Bottom 0.305: v22.61,43.81 22.61,45.47 25.78,48.64 36.7,48.64 37.34,48.01 38.35,48.01 39.12,48.77 TP_9.X 40.64,49.28 42.42,49.28 43.43,48.26 45.34,48.26 v54.23,39.37
  Bottom 0.406: v17.65,35.31 21.46,35.31 22.61,36.45 v22.61,43.81
GND  (via drill 0.61)
  Top 0.254: IC2.18 49.22,42.51 | IC2.42 48.72,28.15 46.23,25.65 46.23,24.64 | 54.17,26.97 C23.1 C24.1 | IC2.5 54.45,35.24 C21.2 54.83,34.32 55.82,33.34 v56.4,33.34 | 46.23,24.64 46.23,24.51 47.26,23.48 C19.2 | C8.2 46.23,24.64
  Top 0.305: POWER.6 POWER.7 | 49.22,42.51 49.23,42.26 | IC2.35 44.07,33.74 C20.2
  Top 0.406: IC6.12 36.2,33.78 CAGND.2 | 19.76,32.81 19.51,33.07 K2.4
  Top 0.61: U$5.GND 11.94,23.04 11.94,17.91 10.52,16.49 U$6.P$3
  Top 0.813: 7.41,16.19 U$6.P$3 | U$3.5 29.97,16.38 30.73,17.14 U$3.P$1 31.92,17.82 C_CO3.2 | C_CO2.1 38.17,10.86 38.23,10.92 C_CO1.2
  other vias: 64.52,41.66 54.36,7.37 63.22,47.52 52.07,44.45 63.59,11.49 4.47,51.69 54.86,18.41 19.81,32.77 27.71,44.83 17.29,1.59 35.92,13.11 57.25,28.6 19.56,26.54 17.91,26.54 41.55,31.62 1.63,1.68 59.91,5.27 57.4,15.88 48.99,21.02 38.19,32.83 21.36,29.46 1.04,29.84 5.81,11.24 39.34,17.93 20.07,38.61 35.43,25.91 31.78,39.62 36.86,41.78 10.06,14.86 21.74,6.48 14.12,21.59 24.33,15.75 29.24,18.16 16.41,10.16 35.08,19.3 34.7,16.38 27.58,10.92 37.36,19.68 39.34,19.84 39.34,16.03 41,18.82 41,16.92 42.65,16.03 42.65,17.93 44.17,19.08 44.3,17.04 58.06,22.73 19.58,23.5 17.93,23.5 60.43,39.14 66.13,4.76 14.38,34.04 21.36,47.24 17.55,44.07 21.23,23.5 52.32,18.41 54.86,15.88 51.82,7.37 57.4,18.41 52.32,15.88 48.29,4.95 49.78,15.88 49.78,18.41 46.74,9.91 49.28,12.45 46.74,7.37 49.28,9.91 49.28,7.37 54.36,12.45 56.9,9.91 51.82,12.45 54.36,9.91 56.9,12.45 51.82,9.91 41.68,8.64 44.2,7.37 44.2,9.91
  pour Bottom (isolate 0.254, rank 2): -1.56,58.04 72.39,56.13 72.01,-1.4 -5.57,-1.27
  pour Top (isolate 0.305, rank 2): -3.05,54.97 71.04,54.73 73.58,-2.54 -3.81,-2.92
N$1
  Top 0.305: R6.1 1.4,32.64 LED1.C
N$2
  Top 0.406: IC5.2 33.27,44.32 32.18,43.23 Y1.P$4
N$3
  Top 0.406: IC5.1 33.02,45.59 32.18,46.43 Y1.P$1
N$4
  Top 0.406: IC6.15 36.2,37.59 CFCAP.1
N$5
  Top 0.406: IC6.11 36.2,32.51 CAGND.1
N$6
  Top 0.813: U$3.2 32.51,22.23 C_BST.1
N$7
  Top 0.61: R-UP.1 28.52,12.04 R_DN.2
  Top 0.813: R-UP.1 29.64,12.06 C_UP.2 U$3.6
N$8
  Top 0.406: U$3.3 31.24,21.34 30.35,22.23 24.77,22.23 22.99,20.45 R5.2
N$9  (via drill 0.61)
  Top 0.813: v13.21,36.7 K2.7 11.68,40.59 K1.5 | R7.1 23.09,36.7 v20.83,36.7 | SJ2.2 4.32,34.42 v5.84,32.89
  Bottom 0.813: v20.83,36.7 v13.21,36.7 11.43,36.7 7.62,32.89 v5.84,32.89
N$10
  Top 0.254: IC2.6 55.95,35.74 56.74,34.96 C21.1 57.2,34.86 58.04,34.04 58.35,33.73 L6.1
N$11
  Top 0.406: 7.87,34.54 SJ1.2
  Top 0.61: CDIV1.1 CRES.2
  Top 0.813: 7.87,34.54 7.87,33.15 9.65,31.37 20.95,31.37 22.1,32.51 | K1.7 18.29,39.42 K2.5 18.29,36.58 22.1,32.51 | 22.1,32.51 CRES.2
N$12
  Top 0.61: IC6.6 CRES.1
N$13
  Top 0.61: IC6.8 CDIV1.2 CDIV2.1
N$14  (via drill 0.61)  (1 unrouted)
  Top 0.813: SJ1.1 7.45,37.54 ANT1.P$1 7.98,40.16 v9.02,39.12 | K1.8 18.54,41.7 v18.54,42.42
  Bottom 0.813: v18.54,42.42 15.24,39.12 v9.02,39.12
N$16  (1 unrouted)
  Top 0.813: ANT2.P$2 3.94,44.78 3.94,43.43 5.71,41.66 9.02,41.66 9.91,40.77 9.91,40.26 10.67,39.5 K2.8
N$17
  Top 0.406: IC6.16 34.16,38.92 CDC2.1
N$18
  Top 0.508: IC6.9 34.22,29.27 CDEC.2
N$19
  Top 0.508: IC6.10 33.02,31.24 32,30.23 32,28.83 CDEC.1
N$20
  Top 0.813: IC6.3 26.57,36.32 R7.2
N$21  (via drill 0.61)
  Top 0.813: v10.54,12.32 12.66,14.44 D5.A
  Bottom 0.813: v10.54,12.32 7.22,9 U$9.P$1
N$24
  Top 0.813: D3.P$2 19.94,20.11 R5.1 19.94,19.73 D4.P$2
N$26
  Top 0.813: U$3.7 32.51,13.24 L2.1
N$27
  Top 0.813: U$3.1 33.78,22.23 C_BST.2 37.59,22.48 38.49,21.58 L1.P$2
N$30  (1 unrouted)
  Top 0.813: K2.6 15.75,39.5 15.49,39.75 15.49,42.8 12.95,45.34 12.95,47.88 12.45,48.39 10.41,48.39 8.53,50.27 ANT2.P$3
N$32
  Top 0.406: U2.4 20.45,40.3 20.45,42.29 19.3,43.43 19.3,45.47 | 19.3,45.47 K1.1 | K1.3 15.7,45.47 19.3,45.47
N$35  (1 unrouted)
  Top 0.813: ANT1.P$4 1.93,43.16 4.32,40.77 SJ2.1 | K1.6 12.01,43.16 ANT1.P$3
PA00_XIN32
  Top 0.254: IC2.1 53.26,33.23 53.26,30.8 Y4.P$1 53.06,29.24 C23.2
PA01_XOUT32
  Top 0.254: IC2.2 53.76,33.74 56.23,31.27 Y4.P$2 56.16,29.11 C24.2
PA02_AIN0
  Top 0.254: IC2.3 54.02,34.24 56.26,32 59.31,32 59.31,9.65 54.36,4.7 52.7,4.7 50.8,2.79 TP_A0.X
PA03_AREFA
  Top 0.254: IC2.4 52.38,34.74 52.07,35.05 52.07,38.73 55.04,41.7 C5.+ 57.39,41.4 C4.1 64.77,47.15 64.77,51.69 63.63,52.83 25.91,52.83 TP_AREF.X
  Bottom 0.305: TP_AREF.X 23.92,50.76
PA04_AIN4
  Top 0.254: IC2.9 59.28,37.24 60.83,35.69 60.83,8.51 58.42,6.1 TP_A3.X
  Top 0.305: TP_A3.X 58.37,2.59
PA05_AIN5
  Top 0.254: IC2.10 59.54,37.74 61.34,35.94 61.34,2.92 AD.5
PA08_TCC0-W0_PA8
  Top 0.254: IC2.13 51.82,40.27 54.99,43.43 54.99,48.64 55.63,49.28 56.9,49.28 TP_2.X
PA09_TCC0-W1_PA9
  Top 0.254: IC2.14 51.22,40.81 51.44,41.02 51.82,41.02 54.36,43.56 54.36,48.9 55.88,50.42 TP_3.X
PA10_MISO
  Top 0.254: IC2.28 43.66,37.24 42.67,38.23 42.67,39.75 43.05,40.13 43.05,46.61 42.04,47.62 38.99,47.62 38.73,47.37 37.08,47.37 35.18,49.28 32.26,49.28 31.5,50.04 TP_12.X
  Bottom 0.254: TP_12.X 31.48,50.81
  Bottom 0.305: 31.48,50.81 31.46,50.79
PA10_TCC0-W2_PA10
  Top 0.254: IC2.15 50.72,41.07 51.31,41.66 51.69,41.66 53.85,43.81 53.85,49.15 54.61,49.91 54.61,51.44 55.5,52.32 59.44,52.32 TP_1.X
  Bottom 0.305: 60.91,50.74 TP_1.X
PA11_TCC0-W3_PA11
  Top 0.254: IC2.16 50.22,39.44 50.55,39.12 51.69,39.12 52.58,40.01 52.58,40.26 55.63,43.31 55.63,48.39 56.01,48.77 57.28,48.77 57.78,49.28 61.98,49.28 TP_0.X
  Bottom 0.305: 63.57,50.73 TP_0.X
PA13
  Top 0.254: IC2.22 47.22,39.6 46.86,39.24 46.1,39.24 45.72,39.62 IOL.8
PA14_TCC0-W4
  Top 0.254: IC2.23 46.72,45.96 49.91,49.15 51.69,49.15 TP_4.X
PA15_TCC0-W5
  Top 0.254: IC2.24 46.2,40.28 46.2,46.2 TP_5.X
PA16_MOSI
  Top 0.305: IC2.25 44.7,47.38 42.93,49.15 42.93,51.69 42.29,52.32 35.56,52.32 TP_MOSI.X
PA17_SCK  (via drill 0.61)
  Top 0.254: IC2.26 44.69,38.23 | 44.68,38.23 IC2.26 | v37.85,49.15 38.1,48.9 42.29,48.9 44.07,47.12 44.07,39.5 43.69,39.12 43.69,38.73 44.18,38.24 IC2.26
  Bottom 0.305: v37.85,49.15 37.72,49.28 30.48,49.28 TP_SCK.X
PA18_SS
  Top 0.254: IC2.27 43.92,37.74 43.18,38.48 43.18,39.5 43.56,39.88 43.56,46.86 42.16,48.26 38.61,48.26 38.35,48.01 37.34,48.01 36.58,48.77 TP_10.X
  Bottom 0.254: 36.53,50.75 TP_10.X
PA20_TCC0-W6
  Top 0.254: IC2.29 44.71,36.73 45.44,36.73 45.72,37.01 45.72,38.86 45.21,39.37 45.21,47.62 44.45,48.39 44.45,51.56 45.21,52.32 46.74,52.32 TP_6.X
PA21_RTC_INT
  Top 0.254: IC2.30 43.9,36.24 42.16,37.97 42.16,40.39 42.55,40.77 42.55,43.81 R9.1
  Top 0.406: R9.1 IC5.7
PA22_SDA  (via drill 0.61)
  Top 0.254: IC2.31 43.63,35.74 41.4,37.97 R13.1 41.27,40.51 v41.15,40.64 40.06,41.72 IC5.5 | v34.67,47.62 33.66,48.64 32,48.64 31.37,49.28 22.86,49.28 TP_SDA.X
  Bottom 0.254: v41.15,40.64 40.77,40.64 34.67,46.74 v34.67,47.62
PA23_SCL
  Top 0.254: IC2.32 42.61,35.24 R12.1 41.91,35.81 40.39,37.34 40.39,39.5 38.23,41.66 38.23,43.05 | 38.23,43.05 IC5.6 | 38.23,43.05 38.23,44.58 36.32,46.48 34.16,46.48 32.64,48.01 31.62,48.01 30.99,48.64 20.95,48.64 TP_SCL.X
PA27_TX_LED  (via drill 0.61)
  Top 0.305: IC2.39 47.22,29.57 45.59,27.94 42.93,27.94 42.04,27.05 40.51,27.05 v40.26,26.8 | v7.24,31.5 4.32,31.5 R6.2
  Bottom 0.305: v40.26,26.8 38.86,26.8 32.38,33.27 22.86,33.27 21.08,31.5 v7.24,31.5
PA28_SD_CS  (via drill 0.61)
  Top 0.305: IC2.41 48.22,28.66 45.09,25.53 v38.73,25.53
  Bottom 0.305: U$4.1 32.6,32.05 38.73,25.91 v38.73,25.53
PA30_SWCLK
  Top 0.254: IC2.45 50.22,28.27 51.05,27.43 R4.1
PA31_SWDIO
  Top 0.254: 50.72,22.91 R3.2 51.18,22.86 51.94,23.62 51.94,27.69 50.72,28.91 IC2.46
PB02  (via drill 0.61)
  Top 0.254: IC2.47 51.22,29.3 52.58,27.94 52.58,26.42 53.21,25.78 55.12,25.78 v56.26,24.64 | v62.61,23.37 61.85,22.61 61.85,4.19 AD.6
  Bottom 0.254: v56.26,24.64 61.34,24.64 v62.61,23.37
PB03_RFIDIN  (via drill 0.61)
  Top 0.305: IC2.48 51.72,34.39 50.8,35.31 v50.8,37.34 | IC6.13 35.56,35.05 36.32,35.81 38.1,35.81 v38.35,36.07
  Bottom 0.305: v50.8,37.34 49.53,36.07 v38.35,36.07
PB08_AIN2
  Top 0.254: IC2.7 58.75,36.24 59.82,35.18 59.82,9.27 53.34,2.79 TP_A1.X
  Top 0.305: TP_A1.X 53.37,2.56
PB09_AIN3
  Top 0.254: IC2.8 59.02,36.74 60.33,35.43 60.33,8.89 55.88,4.45 TP_A2.X
PB10_S4_SPI_MOSI  (via drill 0.61)
  Top 0.305: IC2.19 48.72,39.45 46.48,37.21 v46.48,34.29
  Bottom 0.305: v46.48,34.29 46.48,32 | 46.48,32 46.48,31.07 39.75,24.34 33.06,24.34 30.48,26.92 30.48,27.56 28.49,29.55 U$4.2 27.35,29.55 | ICSP.4 67.44,29.21 67.44,31.11 66.67,31.88 65.91,31.88 61.47,36.32 52.45,36.32 48.13,32 46.48,32
PB11_S4_SPI_SCK  (via drill 0.61)
  Top 0.254: IC2.20 48.22,41.26 47.8,41.68 47.8,45.11 48.92,46.23 v52.07,46.23 | 62.48,36.83 62.48,29.08 ICSP.3
  Top 0.305: 62.48,36.83 61.98,37.34 v61.98,42.04
  Bottom 0.305: v61.98,42.04 57.78,46.23 v52.07,46.23
  Bottom 0.406: ICSP.3 59.05,27.94 57.02,25.91 44.45,25.91 40.39,21.84 28.7,21.84 28.5,22.05 U$4.5
PB12_S4_SPI_MISO  (via drill 0.61)
  Top 0.254: IC2.21 47.72,40.92 47.28,41.36 47.28,45.69 49.34,47.75 v52.07,47.75 | 63.12,30.99 ICSP.1
  Top 0.305: 63.12,30.99 63.12,37.21 62.74,37.59 62.74,40.39 63.12,40.77 v63.12,43.81
  Bottom 0.254: 63.12,43.94 v63.12,43.81
  Bottom 0.305: v52.07,47.75 59.18,47.75 v63.12,43.81
  Bottom 0.406: ICSP.1 63.63,32 60.83,34.8 53.09,34.8 48.77,30.48 47.88,30.48 40.01,22.61 29.08,22.61 28.45,23.24 24.89,23.24 24.26,22.61 24.26,17.53 24.74,17.05 U$4.7
PB22_RFID_RDY  (via drill 0.61)
  Top 0.305: v43.31,29.72 45.09,29.72 46.22,30.85 IC2.37 | v31.75,37.59 IC6.2
  Bottom 0.254: v31.75,37.59 32.89,36.45 32.89,34.54 37.72,29.72 v43.31,29.72
PB23_RFID_SHD  (via drill 0.61)
  Top 0.305: IC2.38 46.72,30.21 45.09,28.57 41.91,28.57 v41.53,28.19 | v31.75,35.81 32.64,35.81 33.15,36.32 IC6.14
  Bottom 0.254: v31.75,35.81 31.75,34.8 38.35,28.19 v41.53,28.19
PWRIN_1  (1 unrouted)
  Top 0.813: U$6.P$1 7.57,11.84 U$9.P$3
RESET  (via drill 0.61)
  Top 0.406: RESET.4 RESET.3 26.75,0.76 31.24,0.76 TP_RESET.X | R2.2 42.93,24.13 43.56,23.5 44.7,23.5 46.61,21.59 v46.61,13.97
  Top 0.61: 33.02,5.82 D2.A | D2.A 32.78,6.71 31.39,8.11 R1.1 | TP_RESET.X 33.02,5.58 D2.A
  Top 0.813: v38.61,8.51 35.92,5.82 D2.A
  Bottom 0.406: ICSP.5 63.75,25.27 63.75,24.64 64.52,23.88 65.15,23.88 67.31,21.59 67.31,16.13 66.64,15.46 CN2.10 65.53,15.02 64.48,13.97 v46.61,13.97 44.07,13.97 v38.61,8.51
SWCLK  (via drill 0.61)
  Top 0.254: R4.2 54.1,24.51 v54.36,24.64
  Bottom 0.305: CN2.4 66.26,19.27 66.67,19.68 66.67,21.34 65.53,22.48 63.5,22.48 62.48,21.46 57.53,21.46 v54.36,24.64
SWDIO  (via drill 0.61)
  Top 0.254: R3.1 v54.23,22.86
  Bottom 0.305: CN2.2 65.53,20.95 64.77,21.72 63.63,21.72 62.74,20.83 57.28,20.83 55.24,22.86 v54.23,22.86
TARGET_RESET
  Top 0.305: R2.1 C8.1 45.09,26.42 47.72,29.05 IC2.40
TARGET_USB_N
  Top 0.254: U$5.D- 9.52,25.4 14.22,25.4 | 14.22,25.4 26.04,25.4 arc47 37.21,29.72 40.64,33.53 arc-54 42.67,34.74 IC2.33 | Z6.1 14.22,26.45 14.22,25.4
TARGET_USB_P
  Top 0.254: IC2.34 IC2.34 arc90 IC2.34 | 44.62,34.24 IC2.34 | U$5.D+ 14.22,24.64 | 14.22,24.64 26.92,24.64 arc50 38.23,29.72 41.27,33.15 arc-58 43.56,34.24 IC2.34 | Z5.1 14.22,23.58 14.22,24.64
VBAT1  (via drill 0.61)  (1 unrouted)
  Top 0.254: IC5.3 33.72,42.99
  Top 0.406: 33.72,42.99 33.47,42.99 31.75,41.27 24.89,41.27 24.26,41.91 24.26,44.07 22.86,45.47 v21.34,45.47
  Bottom 0.406: v21.34,45.47 15.11,45.47 G1.+@1
VDDCORE
  Top 0.254: IC2.43 49.22,27.76 47.37,25.91 C19.1
VIN  (via drill 0.61)
  Top 0.406: 29.59,20.57 29.92,20.25 U$3.4
  Top 0.813: 29.59,20.57 C_VC1.2 24.77,20.58 22.73,18.54 22.73,16.59 D4.P$1 | D5.C 17.44,16.76 19.81,16.76 20.95,15.62 D4.P$1 | D4.P$1 v20.95,12.95
  Bottom 0.813: POWER.8 45.72,2.67 41.27,7.11 23.5,7.11 20.95,9.65 v20.95,12.95
XUSB  (via drill 0.61)
  Top 0.508: v12.57,26.92 12.61,27.59 C26.1
  Top 0.61: U$5.VBUS 11.89,26.24 v12.57,26.92
  Bottom 0.61: v12.57,26.92 12.57,8.66 U$9.P$4

## Text on the board
tPlace: SCK | PA17 | MISO | PA10 | PA23 | PA22 | PA03 | MOSI | PA16 | SS | PA18 | GPIO3 | PA7 | GPIO2 | PA6 | PA13 | PA20 | PA15 | PA14 | PA9 | PA8 | PA10 | 0
tNames: DIGITAL | SCL | SDA | AREF | GND | 1 | IOREF | RESET | 3V3 | 5V | GND | VIN | PA2 | PB08 | PB09 | PB04 | PB05 | PB02
bNames: designed by | tinker it
ReferenceLC: ON
214bmp: D:/SmartProjects/Snc/a4_bn_logo2.bmp